# EAGLE board Controle_4_reles Vback (EAGLE 4.09)
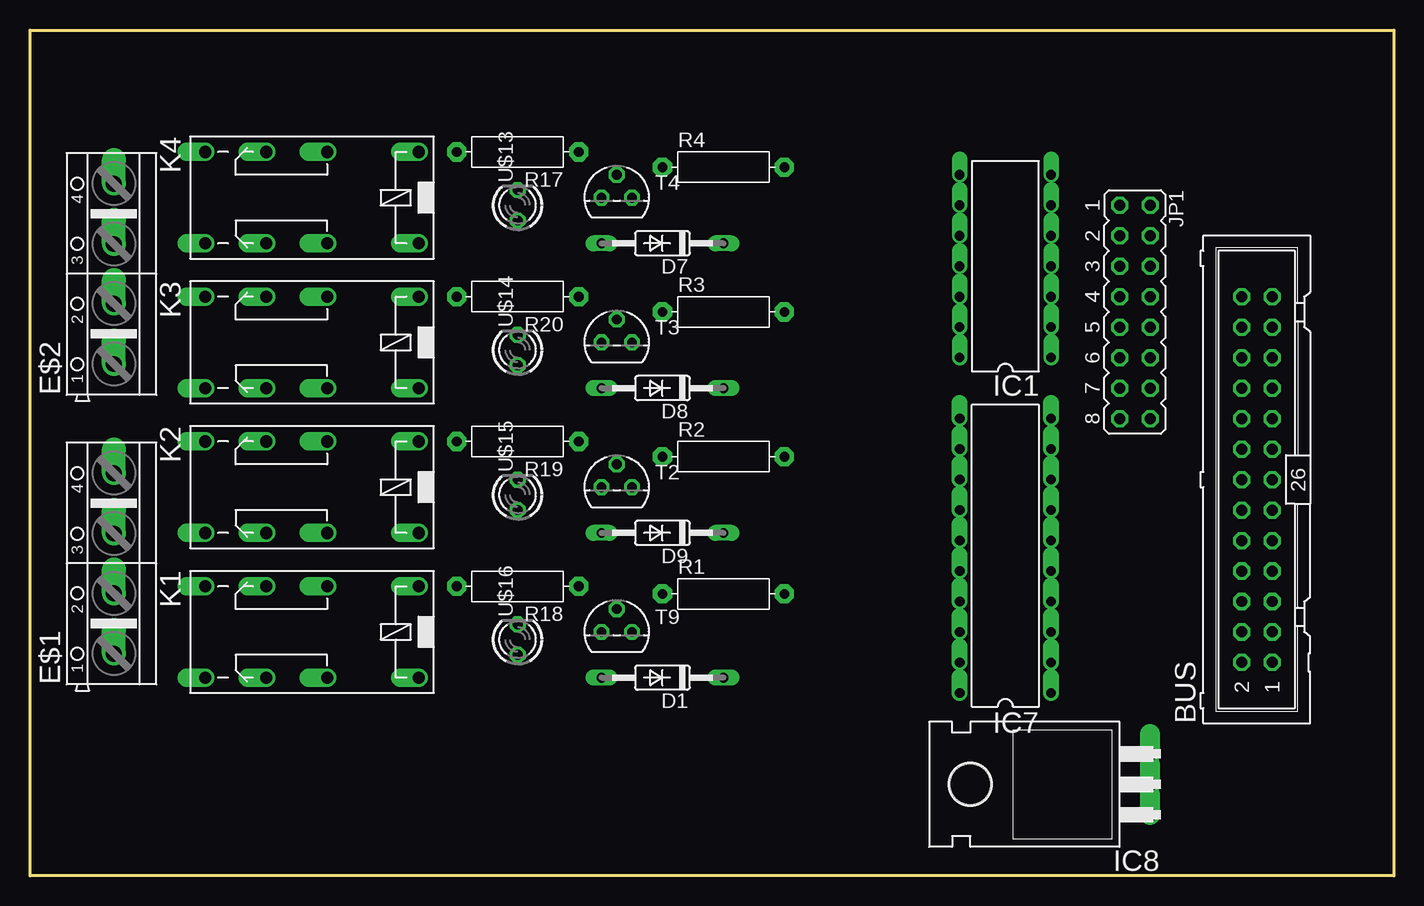
[diagram p0: board, top side]
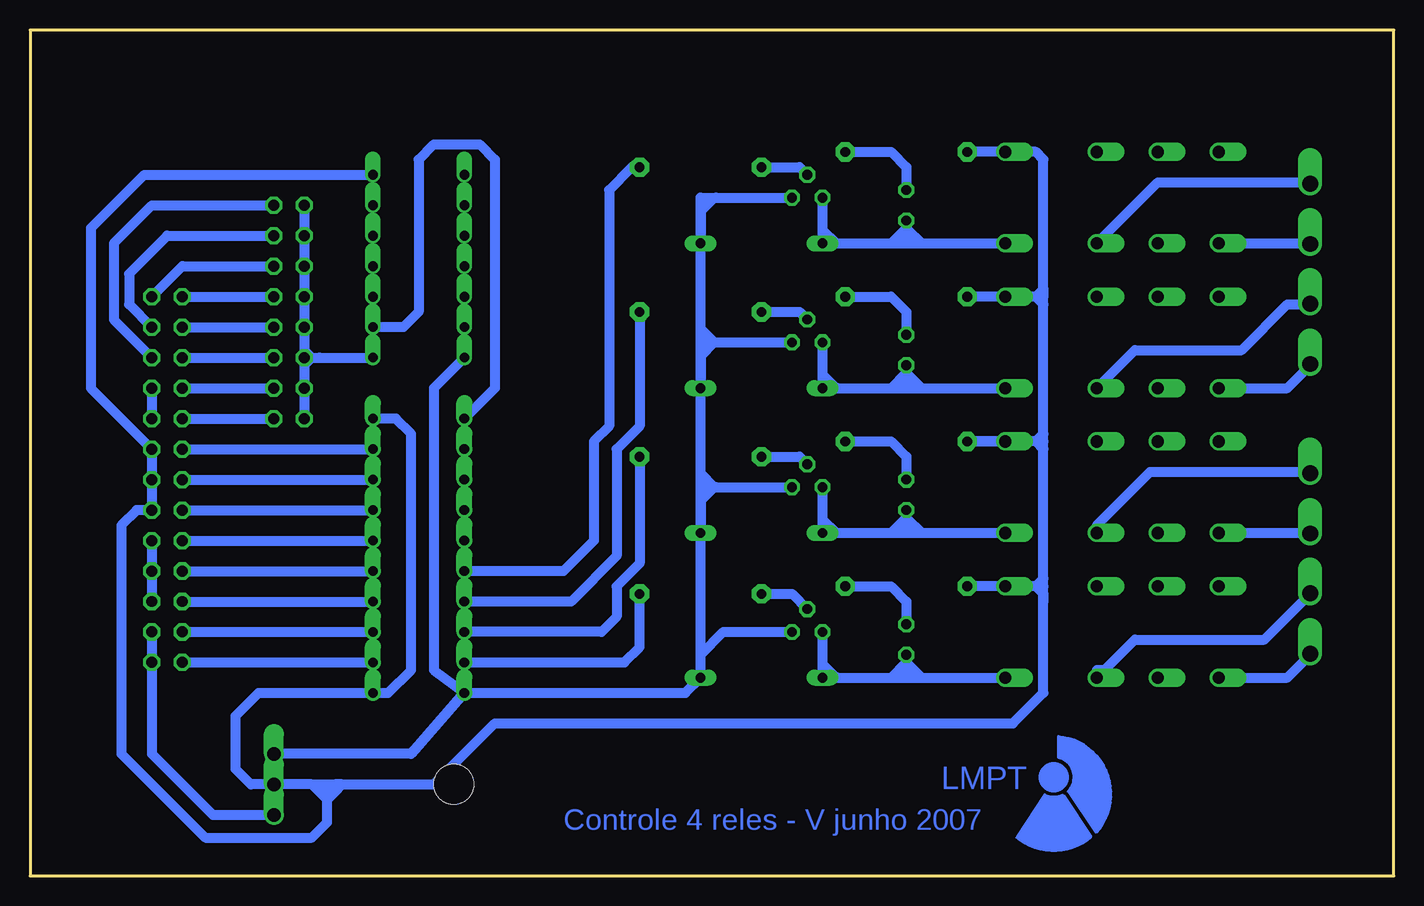
[diagram p1: board, bottom side, seen from below]

Size 113.66 x 70.48 mm. Coordinates in mm from the lower left corner, seen from the top.
Outline: 113.66,70.48 113.66,0 0,0 0,70.48 113.66,70.48
Copper layers used: Bottom

## Footprints (pad centres in the part's own frame; a part is rotated, then mirrored left to right if it is on the bottom)
ML26 = drill 0.914 octagon: 1 -15.24,-1.27; 2 -15.24,1.27; 3 -12.7,-1.27; 4 -12.7,1.27; 5 -10.16,-1.27; 6 -10.16,1.27; 7 -7.62,-1.27; 8 -7.62,1.27; 9 -5.08,-1.27; 10 -5.08,1.27; 11 -2.54,-1.27; 12 -2.54,1.27; 13 0,-1.27; 14 0,1.27; 15 2.54,-1.27; 16 2.54,1.27; 17 5.08,-1.27; 18 5.08,1.27; 19 7.62,-1.27; 20 7.62,1.27; 21 10.16,-1.27; 22 10.16,1.27; 23 12.7,-1.27; 24 12.7,1.27; 25 15.24,-1.27; 26 15.24,1.27
DO35-10 = drill 0.813 long: A 5.08,0; C -5.08,0
AK500/4 = drill 1.321 offset: 1 -7.518,0; 2 -2.489,0; 3 2.489,0; 4 7.518,0
DIL14 = drill 0.8 offset: 1 -7.62,-3.81; 2 -5.08,-3.81; 3 -2.54,-3.81; 4 0,-3.81; 5 2.54,-3.81; 6 5.08,-3.81; 7 7.62,-3.81; 8 7.62,3.81; 9 5.08,3.81; 10 2.54,3.81; 11 0,3.81; 12 -2.54,3.81; 13 -5.08,3.81; 14 -7.62,3.81
DIL20 = drill 0.813 offset: 1 -11.43,-3.81; 2 -8.89,-3.81; 3 -6.35,-3.81; 4 -3.81,-3.81; 5 -1.27,-3.81; 6 1.27,-3.81; 7 3.81,-3.81; 8 6.35,-3.81; 9 8.89,-3.81; 10 11.43,-3.81; 11 11.43,3.81; 12 8.89,3.81; 13 6.35,3.81; 14 3.81,3.81; 15 1.27,3.81; 16 -1.27,3.81; 17 -3.81,3.81; 18 -6.35,3.81; 19 -8.89,3.81; 20 -11.43,3.81
TO220H = drill 1.118 offset: 1 -2.54,-10.16; 2 0,-10.16; 3 2.54,-10.16 | hole 3.302: 0,4.826
JP8Q = drill 0.914 octagon: 1 -8.89,-1.27; 2 -8.89,1.27; 3 -6.35,-1.27; 4 -6.35,1.27; 5 -3.81,-1.27; 6 -3.81,1.27; 7 -1.27,-1.27; 8 -1.27,1.27; 9 1.27,-1.27; 10 1.27,1.27; 11 3.81,-1.27; 12 3.81,1.27; 13 6.35,-1.27; 14 6.35,1.27; 15 8.89,-1.27; 16 8.89,1.27
351 = drill 1.016 offset: 1 -3.81,-3.81; 16 -3.81,3.81; O1 8.89,-3.81; O2 8.89,3.81; P1 3.81,-3.81; P2 3.81,3.81; S1 13.97,-3.81; S2 13.97,3.81
R-10 = drill 0.813 pad 1.6 octagon: 1 -5.08,0; 2 5.08,0
TO92 = drill 0.813 octagon: 1 1.27,0; 2 0,1.905; 3 -1.27,0
LED3MM = drill 0.813 octagon: A -1.27,0; K 1.27,0

## Placement (x,y rotation side)
BUS  [ML26]  102.23,33.02 90 top
D1  1N4148  [DO35-10]  52.7,16.51 180 top
D7  1N4148  [DO35-10]  52.7,52.7 180 top
D8  1N4148  [DO35-10]  52.7,40.64 180 top
D9  1N4148  [DO35-10]  52.7,28.58 180 top
E$1  [AK500/4]  6.98,26.03 90 top
E$2  [AK500/4]  6.98,50.16 90 top
IC1  7404N  [DIL14]  81.28,50.8 90 top
IC7  74AS573N  [DIL20]  81.28,26.67 90 top
IC8  7805T  [TO220H]  83.19,7.62 90 top
JP1  [JP8Q]  92.07,46.99 270 top
K1  351  [351]  28.57,20.32 180 top
K2  351  [351]  28.57,32.38 180 top
K3  351  [351]  28.57,44.45 180 top
K4  351  [351]  28.57,56.51 180 top
R1  1k  [R-10]  57.78,23.49 0 top
R2  1k  [R-10]  57.78,34.92 0 top
R3  1k  [R-10]  57.78,46.99 0 top
R4  1k  [R-10]  57.78,59.05 0 top
R17  500  [R-10]  40.64,60.32 180 top
R18  500  [R-10]  40.64,24.13 180 top
R19  500  [R-10]  40.64,36.19 180 top
R20  500  [R-10]  40.64,48.26 180 top
T2  BC327  [TO92]  48.89,32.38 0 top
T3  BC327  [TO92]  48.89,44.45 0 top
T4  BC327  [TO92]  48.89,56.51 0 top
T9  BC327  [TO92]  48.89,20.32 0 top
U$13  [LED3MM]  40.64,55.88 90 top
U$14  [LED3MM]  40.64,43.81 90 top
U$15  [LED3MM]  40.64,31.75 90 top
U$16  [LED3MM]  40.64,19.69 90 top

## Library data of the parts
BUS = con-harting-ml
D1 D7-D9 = diode
E$1 E$2 = con-ptr500
IC1 IC7 = 74xx-us
IC8 = linear
JP1 = jumper
K1-K4 = relay
R1-R4 R17-R20 = discrete
T2-T4 T9 = transistor-pnp
U$13-U$16 = led

## Nets
+5V: BUS.5 BUS.7 BUS.9
+5VR1: D1.C D7.C D8.C D9.C IC1.14 IC7.20 IC8.3 T2.1 T3.1 T4.1 T9.1
+12V: BUS.1 BUS.3 IC8.1
-12V: BUS.17 BUS.19
ADDR0: BUS.21 JP1.2
ADDR1: BUS.23 JP1.4
ADDR2: BUS.25 JP1.6
ADDR3: BUS.26 JP1.8
ADDR4: BUS.24 JP1.10
ADDR5: BUS.22 JP1.12
ADDR6: BUS.20 JP1.14
ADDR7: BUS.18 JP1.16
N$3: IC7.19 R1.2
N$4: IC7.18 R2.2
N$6: IC7.16 R4.2
N$10: R1.1 T9.2
N$13: IC7.17 R3.2
N$17: R2.1 T2.2
N$18: D1.A K1.16 T9.3 U$16.A
N$19: D9.A K2.16 T2.3 U$15.A
N$21: R3.1 T3.2
N$22: D8.A K3.16 T3.3 U$14.A
N$24: R4.1 T4.2
N$25: D7.A K4.16 T4.3 U$13.A
N$33: IC1.1 JP1.1 JP1.3 JP1.5 JP1.7 JP1.9 JP1.11 JP1.13 JP1.15
N$51: R18.1 U$16.K
N$53: IC1.2 IC7.11
N$94: R20.1 U$14.K
N$95: R19.1 U$15.K
N$98: R17.1 U$13.K
PB0: BUS.2 IC7.2
PB1: BUS.4 IC7.3
PB2: BUS.6 IC7.4
PB3: BUS.8 IC7.5
PB4: BUS.10 IC7.6
PB5: BUS.12 IC7.7
PB6: BUS.14 IC7.8
PB7: BUS.16 IC7.9
PE: BUS.11 BUS.13 BUS.15 IC1.7 IC7.1 IC7.10 IC8.2 K1.1 K2.1 K3.1 K4.1 R17.2 R18.2 R19.2 R20.2
S$1: K1.S2
S$5: K2.S2
S$6: K2.P2
S$7: K3.S2
S$8: K3.P2
S$9: K4.S2
S$10: K4.P2

## Tracks (layer width: path | path; a pad name or v marks a point on that pad's centre or on a via)
+5V
  Bottom 0.813: BUS.5 BUS.7 BUS.9
+5VR1
  Bottom 0.61: 57.78,55.24 56.52,56.51 | 57.78,43.18 56.52,44.45 57.78,45.72 | 57.78,31.11 56.52,32.38 57.78,33.66
  Bottom 0.813: D7.C 57.78,55.24 57.78,56.51 | T4.1 56.52,56.51 57.78,56.51 | 57.78,56.51 D8.C 57.78,43.18 57.78,44.45 | T3.1 56.52,44.45 57.78,44.45 | 57.78,44.45 57.78,45.72 D9.C 57.78,31.11 57.78,32.38 | T9.1 55.88,20.32 57.78,18.41 D1.C | T2.1 56.52,32.38 57.78,32.38 | 57.78,32.38 57.78,33.66 D1.C | D1.C 59.05,15.24 IC7.20 | IC8.3 81.91,10.16 IC7.20 | IC7.20 80.01,17.14 80.01,40.64 IC1.14
+12V
  Bottom 0.813: BUS.3 BUS.1 103.5,10.16 98.42,5.08 IC8.1
-12V
  Bottom 0.813: BUS.19 BUS.17
ADDR0
  Bottom 0.813: BUS.21 106.68,46.35 106.68,52.7 103.5,55.88 JP1.2
ADDR1
  Bottom 0.813: JP1.4 102.23,53.34 105.41,50.16 105.41,47.62 BUS.23
ADDR2
  Bottom 0.813: JP1.6 100.97,50.8 BUS.25
ADDR3
  Bottom 0.813: BUS.26 JP1.8
ADDR4
  Bottom 0.813: BUS.24 JP1.10
ADDR5
  Bottom 0.813: BUS.22 JP1.12
ADDR6
  Bottom 0.813: BUS.20 JP1.14
ADDR7
  Bottom 0.813: BUS.18 JP1.16
N$3
  Bottom 0.813: R1.2 62.86,19.05 64.13,17.78 IC7.19
N$4
  Bottom 0.813: R2.2 62.86,26.03 64.77,24.13 64.77,21.59 66.04,20.32 IC7.18
N$6
  Bottom 0.813: IC7.16 69.85,25.4 69.22,25.4 66.67,27.94 66.67,36.19 65.41,37.46 65.41,57.15 63.5,59.05 R4.2
N$10
  Bottom 0.813: R1.1 50.16,23.49 T9.2
N$11
  Bottom 0.254: 27.97,11.6 27.97,9.88
N$13
  Bottom 0.813: R3.2 62.86,37.46 64.77,35.56 64.77,26.67 68.58,22.86 IC7.17
N$17
  Bottom 0.813: R2.1 49.53,34.92 T2.2
N$18
  Bottom 0.61: 47.62,17.78 46.35,16.51
  Bottom 0.813: T9.3 47.62,17.78 D1.A 46.35,16.51 41.91,16.51 | 39.37,16.51 K1.16 | 40.64,16.51 39.37,16.51 | 41.91,16.51 40.64,16.51 | 40.64,17.78 U$16.A | 40.64,16.51 40.64,17.78 | 41.91,16.51 40.64,17.78 | 40.64,17.78 39.37,16.51
N$19
  Bottom 0.61: 47.62,29.84 46.35,28.58
  Bottom 0.813: T2.3 47.62,29.84 D9.A 46.35,28.58 41.91,28.58 | 39.37,28.58 K2.16 | 40.64,28.58 39.37,28.58 | 41.91,28.58 40.64,28.58 | 40.64,29.84 U$15.A | 40.64,28.58 40.64,29.84 | 41.91,28.58 40.64,29.84 | 40.64,29.84 39.37,28.58
N$21
  Bottom 0.813: R3.1 49.53,46.99 T3.2
N$22
  Bottom 0.61: 47.62,41.91 46.35,40.64
  Bottom 0.813: T3.3 47.62,41.91 D8.A 46.35,40.64 41.91,40.64 | 39.37,40.64 K3.16 | 40.64,40.64 39.37,40.64 | 41.91,40.64 40.64,40.64 | 40.64,41.91 U$14.A | 40.64,40.64 40.64,41.91 | 41.91,40.64 40.64,41.91 | 40.64,41.91 39.37,40.64
N$24
  Bottom 0.813: R4.1 49.53,59.05 T4.2
N$25
  Bottom 0.61: 47.62,53.97 46.35,52.7
  Bottom 0.813: T4.3 47.62,53.97 D7.A 46.35,52.7 41.91,52.7 | 39.37,52.7 K4.16 | 40.64,52.7 39.37,52.7 | 41.91,52.7 40.64,52.7 | 40.64,53.97 U$13.A | 40.64,52.7 40.64,53.97 | 41.91,52.7 40.64,53.97 | 40.64,53.97 39.37,52.7
N$33
  Bottom 0.813: JP1.1 JP1.3 JP1.5 JP1.7 JP1.9 90.8,43.81 | 90.8,43.81 JP1.11 | JP1.11 90.8,42.55 | 90.8,42.55 JP1.13 JP1.15 | JP1.11 90.17,43.18 | IC1.1 89.53,43.18 90.17,43.18 | 90.8,42.55 90.17,43.18 | 90.8,43.81 90.8,42.55 | 90.8,43.81 90.17,43.18
N$51
  Bottom 0.813: U$16.K 40.64,22.86 41.91,24.13 R18.1
N$53
  Bottom 0.813: IC1.2 82.55,45.72 81.28,46.99 81.28,59.69 80.01,60.96 76.2,60.96 74.93,59.69 74.93,40.64 IC7.11
N$59
  Bottom 0.254: 27.1,7.05 24.82,3.65
N$94
  Bottom 0.813: U$14.K 40.64,46.99 41.91,48.26 R20.1
N$95
  Bottom 0.813: U$15.K 40.64,34.92 41.91,36.19 R19.1
N$98
  Bottom 0.813: U$13.K 40.64,59.05 41.91,60.32 R17.1
N$128
  Bottom 0.254: 27.57,6.7 25.27,3.25
N$130
  Bottom 0.254: 29.1,6.7 31.38,3.22
N$138
  Bottom 0.61: 25.68,3.27 27.69,6.37 28.3,6.16 26.09,3.02 27.2,2.55 28.88,2.33 30.03,2.61 31.02,3.27 28.94,6.29 28.57,6.26 26.76,3.03 28.96,2.71 30.53,3.49 28.67,6.09 27.48,3.02 30.15,3.69 28.78,5.42 28.08,3.23 29.66,3.91 28.84,4.69 28.77,3.75 28.93,2.67
N$147
  Bottom 0.61: 24.75,4.13 23.92,5.86 23.88,7.2 24.18,8.48 24.61,9.34 25.47,10.18 26.5,10.94 27.74,11.28 27.59,10.08 26.56,9.24 26.36,8.08 26.47,7.58 26.73,7.03 25.01,4.51 24.56,5.28 24.89,5.31 26.29,7.33 26.06,7.8 24.36,5.51 24.38,8.51 26.52,10.73 27.46,10.59 26.79,9.83 26.62,10.39 26.21,9.47 25.51,9.33 26.19,8.85 25.08,8.9 26.13,8.21 24.68,8.52 25.78,7.81 24.56,7.94 25.35,7.42 24.69,7.18 24.88,6.56
PB0
  Bottom 0.813: BUS.2 IC7.2
PB1
  Bottom 0.813: BUS.4 IC7.3
PB2
  Bottom 0.813: BUS.6 IC7.4
PB3
  Bottom 0.813: BUS.8 IC7.5
PB4
  Bottom 0.813: BUS.10 IC7.6
PB5
  Bottom 0.813: BUS.12 IC7.7
PB6
  Bottom 0.813: BUS.14 IC7.8
PB7
  Bottom 0.813: BUS.16 IC7.9
PE
  Bottom 0.813: R17.2 K4.1 29.84,60.32 29.21,59.69 29.21,48.89 | R20.2 K3.1 29.84,48.26 | 29.84,48.26 29.21,48.26 29.21,48.89 | 29.21,48.89 29.84,48.26 | IC7.10 83.19,38.1 81.91,36.83 81.91,17.14 83.82,15.24 IC7.1 94.61,15.24 96.52,13.33 96.52,8.89 95.25,7.62 IC8.2 90.17,7.62 | 29.21,47.62 29.21,48.89 | 29.21,47.62 29.84,48.26 | 29.21,36.83 29.21,47.62 | 29.21,36.19 29.21,36.83 | 29.21,36.19 R19.2 K2.1 29.84,36.19 | 29.84,36.19 29.21,36.83 | 29.84,36.19 29.21,36.19 | 29.21,35.56 29.84,36.19 | 29.21,35.56 29.21,36.19 | 29.21,36.19 29.21,24.77 29.84,24.13 | R18.2 K1.1 29.84,24.13 | 29.21,24.13 29.21,35.56 | 29.21,24.13 29.84,24.13 | 29.21,23.49 29.21,24.13 | 29.21,23.49 29.21,22.86 | 29.21,23.49 29.84,24.13 | 29.21,23.49 29.21,15.24 31.75,12.7 74.93,12.7 80.01,7.62 87.63,7.62 | 88.27,6.98 88.9,6.98 89.53,7.62 | 88.27,6.98 88.27,7.62 | 89.53,7.62 88.27,7.62 | 90.17,7.62 89.53,7.62 | 87.63,7.62 88.27,6.98 | 87.63,7.62 88.27,7.62 | 88.9,6.35 87.63,7.62 | 88.9,6.35 90.17,7.62 | 88.9,6.35 88.9,4.44 90.17,3.17 99.06,3.17 106.04,10.16 106.04,29.21 104.77,30.48 BUS.11 BUS.13 BUS.15 108.58,40.64 108.58,53.97 104.14,58.42 IC1.7
S$1
  Bottom 0.813: 6.98,18.41 8.89,16.51 K1.S2
S$4
  Bottom 0.813: 24.76,17.14 24.13,17.14 21.59,19.69 10.79,19.69 6.98,23.49
S$5
  Bottom 0.813: K2.S2 6.98,28.58
S$6
  Bottom 0.813: K2.P2 24.76,29.21 20.32,33.66 6.98,33.66
S$7
  Bottom 0.813: K3.S2 8.89,40.64 6.98,42.55
S$8
  Bottom 0.813: 6.98,47.62 8.89,47.62 12.7,43.81 21.59,43.81 K3.P2
S$9
  Bottom 0.813: K4.S2 6.98,52.7
S$10
  Bottom 0.813: 6.98,57.78 19.68,57.78 K4.P2
(copper drawn outside any net)
  Bottom 0.254: 27.2,6.97 arc-125 27.97,9.88 | 27.55,6.72 arc58 29.2,6.77 | 24.82,3.62 arc-128 28,11.58 | 25.25,3.25 arc82 31.47,3.25
  shapes: Bottom circle x2

## Text on the board
Bottom: LMPT | Controle 4 reles - V junho 2007